# Altium PCB WATSH2.PcbDoc
Units mm, origin at the board's own origin, x right, y up, seen from the top; angles counter-clockwise.
Board outline 152.4 x 101.6 mm, 2 copper layers (Top Layer, Bottom Layer); 50 components, 41 nets, 187 pads, 104 vias.
Unrouted connection lines stored in the file: 14.
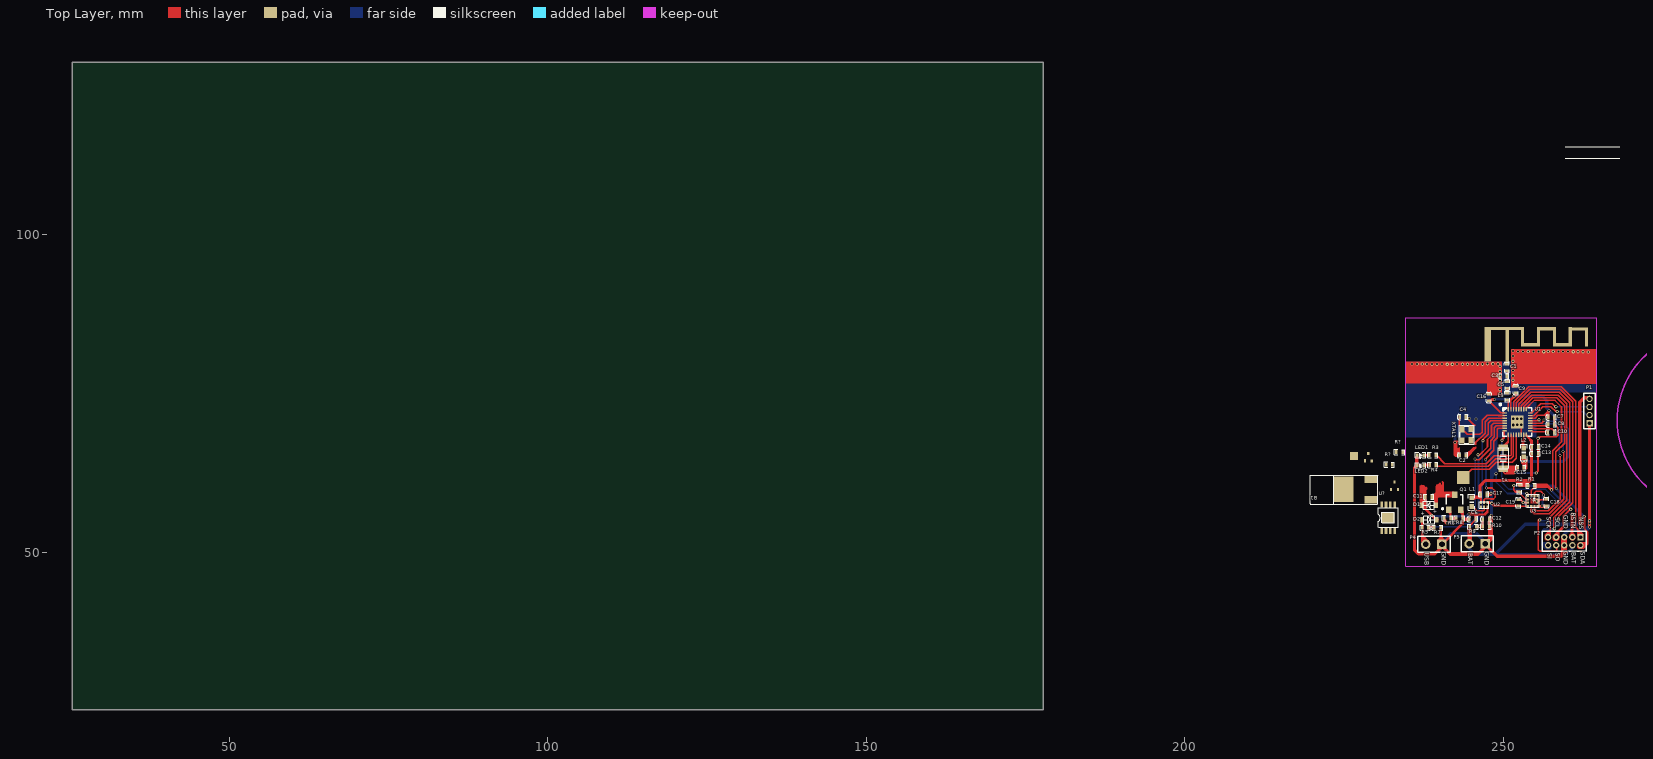
[diagram p0: Top Layer view]
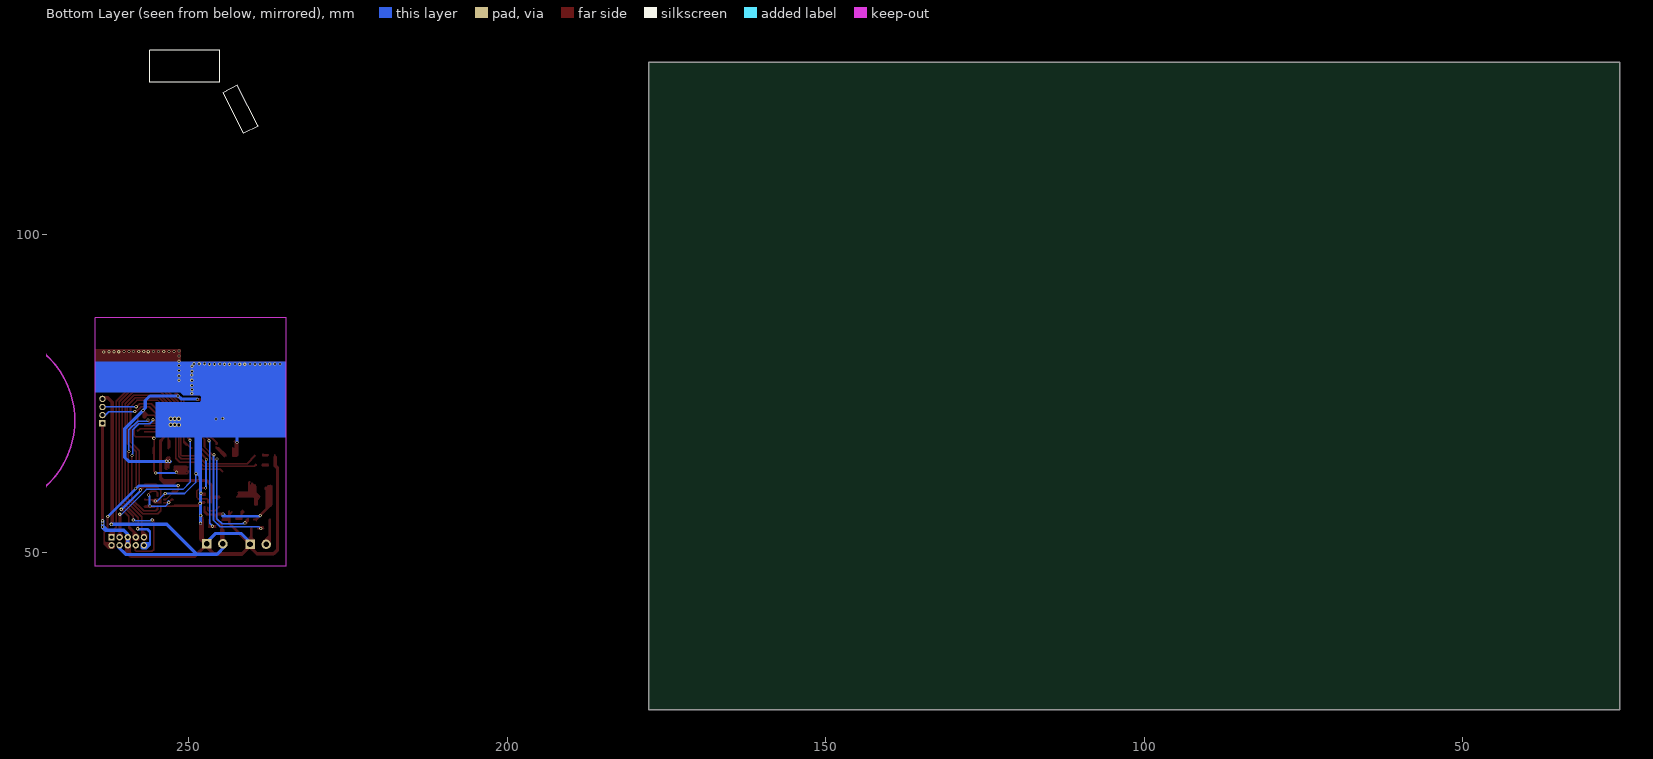
[diagram p1: Bottom Layer view, seen from below]

## Layer stack, top to bottom
Top Layer: signal copper 0.0356
Dielectric: dielectric 0.32, FR-4, Dk 4.8
Bottom Layer: signal copper 0.0356

## Board outline
25.4,25.4 177.8,25.4 177.8,127 25.4,127

## Design rules (kind name [scope] priority, off if disabled: settings)
Clearance [All] p1: gap=0.15
PolygonConnect [All] p1: connectstyle=Relief reliefconductorwidth=0.254 reliefentries=4 polygonreliefangle="90 Angle"
RoomDefinition WATSH2 [InComponentClass('WATSH2')] p1: confinementstyle=ConfineIn formatcopy=TRUE lockcomponents=FALSE outline 0,0 50.8,0 50.8,25.4 0,25.4
RoutingVias [All] p1: holewidth=0.3 width=0.5 viastyle="Through Hole" minholewidth=0.3 minwidth=0.5 maxholewidth=0.3 maxwidth=0.5
SilkscreenOverComponentPads [IsPad] p1: minsilkscreentomaskgap=0.254
SolderMaskExpansion [All] p1: expansion=0.102
Width [All] p1: maxlimit=1 minlimit=0.1 preferedwidth=0.254
27 further rules are at their usual default settings.

## Components (designator, comment, footprint, x,y, rotation, side; value= is the part's Value field where it differs from the comment)
B1 "Motor" MODER 224.914,59.904 r180 top
C1 "2.2PF" 0402_C 250.538,79.12 r90 top
C2 "15PF" 0402_C 243.594,65.308 r180 top
C3 "1PF" 0402_C 250.052,77.757 r0 top
C4 "15PF" 0402_C 243.608,71.32 r180 top
C5 "2.2PF" 0402_C 250.56,76.379 r90 top
C6 "2.2uF" 0402_C 245.175,55.286 r0 top
C7 "104" 0402_C 257.49,71.238 r180 top
C8 "104" 0402_C 257.485,70.141 r180 top
C9 "104" 0402_C 251.964,75.608 r270 top
C10 "104" 0402_C 257.505,68.912 r0 top
C11 "104" 0402_C 238.238,58.763 r180 top
C12 "104" 0402_C 247.237,55.241 r180 top
C13 "106" 0402_C 254.929,65.575 r180 top
C14 "105" 0402_C 254.944,66.608 r180 top
C15 "104" 0402_C 252.741,63.353 r0 top
C16 "104" 0402_C 247.715,74.374 r270 top
C17 "2.2uF" 0402_C 246.892,59.174 r180 top
C18 "104" 0402_C 256.752,57.921 r90 top
C19 "104" 0402_C 252.344,57.85 r270 top
D1 "1N5819" SOD-323 238.199,55.228 r0 top
D2 "1N5819" SOD-323 238.461,57.428 r180 top
L1 "2.2uH" 0603p 245.021,57.956 r270 top
L2 "2.2uH" 0603p 253.195,65.76 r90 top
L3 "0R" 0402_R 250.597,74.596 r90 top
LED1 "LED" 0402_LED 236.984,65.337 r180 top
LED2 "LED" 0402_LED 236.984,63.748 r180 top
P1 "UART" MHDR1X4 263.522,70.355 r90 top
P2 "FLASH_LOAD" MHDR2X5 262.091,52.458 r180 top
P4 "BAT" HDR1X2 240.355,51.342 r180 top
P5 "BAT" HDR1X2 247.162,51.423 r180 top
Q1 "SI2300" SOT-23 242.352,57.944 r0 top
R1 "4.7K" 0402_R 254.293,60.56 r180 top
R2 "4.7K" 0402_R 252.517,60.148 r90 top
R3 "1K" 0402_R 238.951,65.33 r0 top
R4 "1K" 0402_R 238.964,63.772 r0 top
R5 "1M" 0402_R 237.678,53.938 r180 top
R6 "1K" 0402_R 241.276,55.441 r0 top
R7 "470K" 0402_R 239.595,53.934 r180 top
R8 "10K" 0402_R 243.061,55.451 r180 top
R9 "1M" 0402_R 245.15,54.129 r180 top
R10 "470K" 0402_R 247.213,54.146 r180 top
R? "100R" 0402_R 232.142,63.844 r0 top
R? "0.4R" 0402_R 233.739,65.81 r0 top
U1 "BK3431Q" QFN32 252.226,70.53 r270 top
U2 "TPS62730" R-PUSON-N6 246.969,57.527 r0 top
U3 "SC7A21" LGA-12-2*2*1 254.625,58.192 r0 top
U? "TP4056" EMSOP8 231.927,55.564 r0 top
XTAL1 "16MHz_10PPM_12p" 晶振2*2.6 244.341,68.568 r270 top
Y1 "32.768K" 晶振1.5*3.2 249.942,64.858 r270 top

## Footprints (in the part's own frame and the unit in brackets; to place one, negate y for a bottom-side part, rotate by r counter-clockwise, add the part's x,y. Pads: shape width x height; smd on the part's side, far side on the other; paste and mask are expansions set on the pad)
0402_C [mm]
  rect 0.4x0.6 smd: 1(-0.518,-0.008) 2(0.485,-0.01)
  silkscreen extent -0.84,-0.41 0.8,0.39
0402_LED [mm]
  rect 0.4x0.6 smd: 1(-0.506,0.012) 2(0.497,0.012)
  silkscreen extent -0.82,-0.42 0.83,0.51
0402_R [mm]
  rect 0.4x0.6 smd: 1(-0.558,0.013) 2(0.435,0.013)
  silkscreen extent -0.86,-0.4 0.75,0.42
0603p [mil]
  rect 30x30 smd: 1(-27,0) 2(27.5,-0.06)
  silkscreen extent -50,-20 50,20
EMSOP8 [mm]
  rect 1.9x1.65 smd: 0(-0.006,-0.023)
  rect 0.4x1 smd: 1(-1.033,-2.114) 2(-0.356,-2.12) 3(0.33,-2.112) 4(1.026,-2.094) 5(1.033,2.013) 6(0.337,1.995) 7(-0.356,2.016) 8(-1.033,2.022)
  silkscreen extent -1.55,-1.6 1.53,1.5
HDR1X2 [mm] "Connector; Header; 2 Position"
  rect 1.5x1.5 hole 0.9: 1(0,0)
  round 1.5 hole 0.9: 2(2.54,0)
  silkscreen extent -1.27,-1.27 3.81,1.27
LGA-12-2*2*1 [mm]
  rect 0.32x0.32 smd: 1(-0.757,0.702) 2(-0.76,0.19) 3(-0.758,-0.308) 4(-0.751,-0.826) 5(-0.253,-0.826) 6(0.25,-0.82) 7(0.748,-0.826) 8(0.751,-0.314) 9(0.748,0.19) 10(0.748,0.699) 11(0.25,0.696) 12(-0.251,0.699)
  silkscreen extent -1.04,-1.07 1.04,0.97
MHDR1X4 [mm] "Connector; Header; 4 Position"
  rect 1x1 hole 0.6: 1(0,0)
  round 1 hole 0.6: 2(1.27,0) 3(2.54,0) 4(3.81,0)
  silkscreen extent -0.9,-0.9 4.71,0.9
MHDR2X5 [mm] "Connector; Header; 5x2 Position"
  rect 1x1 hole 0.6: 1(0,0)
  round 1 hole 0.6: 2(0,1.27) 3(1.27,0) 4(1.27,1.27) 5(2.54,0) 6(2.54,1.27) 7(3.81,0) 8(3.81,1.27) 9(5.08,0) 10(5.08,1.27)
  silkscreen extent -0.9,-0.9 5.98,2.17
MODER [mm]
  rect 3x4 smd: 0(-0.027,-0.043)
  rect 2x1.2 smd: 1(-4.31,-1.69) 2(-4.279,1.589)
  silkscreen extent -5.35,-2.26 5.24,2.24
QFN32 [mm]
  oct 0.22x0.7 smd: 1(-1.423,-2.039) 8(1.377,-2.039) 17(1.377,1.961) 24(-1.423,1.961)
  rect 0.22x0.7 smd: 2(-1.023,-2.039) 3(-0.623,-2.039) 4(-0.223,-2.039) 5(0.177,-2.039) 6(0.577,-2.039) 7(0.977,-2.039) 18(0.977,1.961) 19(0.577,1.961) 20(0.177,1.961) 21(-0.223,1.961) 22(-0.623,1.961) 23(-1.023,1.961)
  oct 0.7x0.22 smd: 9(1.977,-1.439) 16(1.977,1.361) 25(-2.023,1.361) 32(-2.023,-1.439)
  rect 0.7x0.22 smd: 10(1.977,-1.039) 11(1.977,-0.639) 12(1.977,-0.239) 13(1.977,0.161) 14(1.977,0.561) 15(1.977,0.961) 26(-2.023,0.961) 27(-2.023,0.561) 28(-2.023,0.161) 29(-2.023,-0.239) 30(-2.023,-0.639) 31(-2.023,-1.039)
  rect 2x2 smd: 33(-0.023,-0.039)
  silkscreen extent -2.91,-2.86 2.26,2.23
R-PUSON-N6 [mm]
  rect 0.3x0.49 smd: 1(-0.49,-0.365) 2(0.003,-0.368) 3(0.508,-0.377) 4(0.508,0.365) 5(0,0.368) 6(-0.487,0.368)
  silkscreen extent -0.74,-0.53 0.76,0.53
SOD-323 [mm]
  rect 0.63x0.83 smd: 1(-0.965,-0.025) 2(1.321,-0.025)
  silkscreen extent -0.69,-0.66 1.02,0.61
SOT-23 [mm]
  rect 0.9x0.95 smd: 1(-0.95,-1.175) 2(0.95,-1.175) 3(0,1.175)
  silkscreen extent -2.03,-1.14 1.3,1.18
晶振1.5*3.2 [mm]
  rect 1x1.5 smd: 1(-1.643,0.01) 2(1.656,0.016)
  silkscreen extent -1.64,-0.76 1.64,0.8
晶振2*2.6 [mm]
  rect 1x0.8 smd: 1(-0.846,-0.852) 2(0.938,-0.828) 3(0.92,0.6) 4(-0.864,0.612)
  silkscreen extent -1.43,-1.31 1.5,1.05

## Part data
B1: "Motor, General"
C1 C3 C5: library part CAP, "Capac"
C2 C4: library part CAP, "C"
C6 C7 C8 C9 C10 C11 C12 C13 C14 C15 C16 C17 C18 C19: library part Cap, "Capac"
D1 D2: library part "Diode 1N4001", "1 Amp General Purpose Recti"
L1 L2: library part INDUCTOR
L3: library part INDU
P1: library part MHDR1X4, "Header, 4-Pin"
P2: library part MHDR2X5, "Header, 5-Pin, Dual row"
P4 P5: library part "Header 2", "Header, 2-Pin"
Q1: library part MOSFET-N, "N-Channel MOSFET"
U2: library part TPS627
Y1: library part XTAL_1, "Crys"

## Free pads (board coordinates)
  rect 1.25x1.25 smd: 4(226.573,65.183)
  rect 0.35x0.5 smd: 4(228.263,64.444) 4(228.798,65.614) 4(229.347,64.428) 4(232.357,59.941) 4(232.891,61.111) 4(233.44,59.925)
  rect 1x5 smd: 7(247.526,82.509)
  rect 3.8x0.5 smd: 7(248.914,85.203)
  rect 0.5x6 smd: 7(250.588,82.451)
  rect 2.9x0.5 smd: 7(251.782,85.211)
  rect 0.5x3 smd: 7(252.982,83.922) 7(255.489,83.919) 7(258.003,83.9) 7(260.503,83.916) 7(263.029,83.906)
  rect 3x0.5 smd: 7(254.238,82.659) 7(256.76,85.165) 7(259.258,82.652) 7(261.784,85.153)
  rect 2x2 smd: 8(243.714,61.837)

## Via types
v1: diameter 0.5, hole 0.3, Top Layer to Bottom Layer, 98 vias
v2: diameter 0.7, hole 0.4, Top Layer to Bottom Layer, 6 vias

## Nets (pads, with @x,y where several pads share a name; then routed paths per layer and width w, separated by ;. In a path a pad name is that pad's centre, name@x,y a point inside that pad or via, vN(x,y) a via of type N, cw(c..) or ccw(c..) an arc to the next point about the centre after c; other vN are vias at no path point)
ANT: L3.1 U1.32 | length 1.4
  Top Layer w0.254: L3.1@250.772,73.947 250.784,73.935 U1.32@250.784,72.577
BAT: B1.1 C6.2 C11.2 D1.2 D2.2 P1.1 P2.4 P5.2 R9.2 U2.3 U?.5 | length 115.4
  Top Layer w0.254: 236.955,60.507 236.966,60.497 236.966,57.608 237.26,57.314 D2.2@237.26,57.324 ; D2.2@237.112,57.424 237.19,57.502 237.19,60.632 ; D2.2@237.184,57.518 237.184,57.364 239.397,55.151 D1.2@239.397,55.046 ; 237.229,58.846 237.249,58.866 C11.2@237.691,58.866 ; D2.2@237.273,57.689 237.273,57.486 239.502,55.257 D1.2@239.543,55.257 ; 237.386,60.234 237.386,60.423 ; 237.457,60.242 237.813,59.887 237.813,56.872 237.876,56.809 ; 237.56,60.44 237.568,60.432 237.568,57.172 ; D1.2@239.636,55.234 D1.2@239.642,55.227 ; D1.2@239.706,55.274 D1.2@239.743,55.237 ; P5.2@244.426,51.327 244.702,51.603 R9.2@244.702,54.037 ; P5.2@244.519,51.984 244.519,53.642 244.711,53.834 R9.2@244.711,53.989 ; v1@244.587,56.208 245.363,56.208 245.724,55.846 ; v1(244.6,56.093) 245.379,56.093 245.672,55.801 245.733,55.801 ; v1@244.63,56.013 244.635,56.018 245.308,56.018 245.605,55.72 ; P5.2@244.646,51.152 P5.2@244.691,51.107 ; R9.2@244.659,54.055 244.777,53.937 244.777,53.841 244.976,53.642 P5.2@244.976,51.903 ; R9.2@244.71,54.178 244.71,54.261 C6.2@245.629,55.18 ; R9.2@244.733,53.856 244.851,53.738 P5.2@244.851,52.021 ; P5.2@244.759,51.717 P5.2@244.792,51.684 ; C6.2@245.602,55.39 245.602,55.772 245.867,56.038 247.108,56.038 247.202,56.132 ; C6.2@245.662,55.235 245.662,55.551 246.083,55.972 247.18,55.972 ; 246.973,56.05 247.381,56.458 ; 247.058,55.985 247.456,56.382 U2.3@247.456,57.137 ; 247.119,55.96 247.496,56.337 247.496,57.198 U2.3@247.491,57.203
  Top Layer w0.5: D2.2@237.145,57.409 237.243,57.507 237.243,59.534 237.858,60.15 ; 237.407,59.835 237.407,60.371 237.417,60.381 ; v1(262.129,54.477) 261.975,54.631 261.975,73.644 262.675,74.345 263.53,74.345
  Bottom Layer w0.254: v1(238.758,55.885) 238.803,55.841 244.794,55.841 ; v1@238.774,55.694 244.682,55.694 244.755,55.767 ; 243.702,55.827 244.131,55.827 v1@244.479,56.176
  Bottom Layer w0.5: P5.2@244.378,50.921 245.525,49.774 248.717,49.774 253.42,54.477 v1(262.129,54.477) ; 246.75,49.761 259.877,49.761 260.919,50.803 P2.4@260.919,51.198
BAT_TEXT: C12.2 R9.1 R10.2 U1.4 | length 24.5
  Top Layer w0.2: v1@246.676,67.711 246.688,67.711 247.601,68.624 247.601,70.324 248.046,70.768 U1.4@249.988,70.768 ; 249.722,70.757 U1.4@250.227,70.757
  Top Layer w0.254: R9.1@245.709,54.226 245.762,54.278 246.386,54.278 246.715,54.608 ; R9.1@245.734,54.028 246.759,54.028 R10.2@246.813,54.082 ; v1@246.42,54.123 246.507,54.123 R10.2@246.624,54.241 ; C12.2@246.655,55.167 246.711,55.111 246.711,54.048 R10.2@246.727,54.033 ; R10.2@246.705,54.035 246.759,54.089 C12.2@246.759,55.295
  Bottom Layer w0.2: v1@246.336,54.307 246.648,54.619 v1@246.648,67.612
  other v1: 246.265,54.183 246.817,67.594
GND: C2.2 C3.1 C4.1 C6.1 C7.1 C8.1 C9.1 C12.1 C13.1 C14.1 C15.1 C16.1 C17.1 C18.2 C19.2 LED1.2 LED2.2 P1.4 P2.5 P2.6 P4.1 P5.1 Q1.2 R7.1 R8.1 R10.1 U1.14 U1.33 U2.4 U3.1 U3.4 U3.8 U3.9 U?.1 U?.3 XTAL1.2 XTAL1.4 Y1.2 | length 326.9
  Top Layer w0.254: LED2.2@236.425,63.761 236.455,63.79 LED1.2@236.455,65.37 ; LED2.2@236.437,63.651 236.437,63.497 236.093,63.153 236.093,50.581 236.682,49.992 239.276,49.992 P4.1@240.058,50.774 ; P4.1@239.722,52.034 240.093,52.405 240.093,53.842 R7.1@240.18,53.928 ; P4.1@239.777,51.955 239.849,51.955 240.062,52.168 ; P4.1@240.001,51.446 240.161,51.606 R7.1@240.161,53.943 ; R7.1@240.172,53.881 240.227,53.826 240.227,52.524 P4.1@240.796,51.955 ; P4.1@240.217,51.675 240.599,51.675 243.552,54.627 243.552,56.079 Q1.2@243.218,56.412 ; 240.219,52.271 240.598,51.892 P4.1@240.598,51.861 ; P4.1@240.644,50.909 241.851,49.703 245.714,49.703 247.164,51.153 P5.1@247.164,51.412 ; P4.1@240.942,51.802 243.665,54.525 243.665,55.468 R8.1@243.629,55.505 ; v1@242.478,67.371 242.478,65.472 242.608,65.343 ; 242.629,65.3 242.629,67.404 242.683,67.458 ; 242.78,65.278 242.78,66.411 ; 242.845,67.533 242.338,67.533 242.327,67.544 242.327,65.3 242.435,65.192 243.082,65.192 C2.2@243.093,65.181 ; C2.2@243.035,65.268 243.035,66.411 243.083,66.46 ; Q1.2@243.593,56.6 243.652,56.541 R8.1@243.652,55.399 ; R8.1@243.65,55.227 243.724,55.153 C6.1@244.682,55.153 ; R8.1@243.657,55.419 243.672,55.433 244.571,55.433 C6.1@244.593,55.411 ; R8.1@243.73,55.722 244.134,55.318 244.215,55.318 ; R8.1@243.753,55.271 243.768,55.286 C6.1@244.512,55.286 ; C4.1@244.161,71.298 245.431,70.028 245.538,70.028 ; C17.1@247.369,59.277 247.447,59.356 v1(248.046,59.356) ; C17.1@247.382,59.135 247.382,59.141 247.473,59.05 247.997,59.05 248.149,59.202 v1@248.149,59.348 ; P5.1@247.402,51.904 247.69,52.193 247.69,55.194 247.798,55.301 C12.1@247.798,55.295 ; 247.403,76.874 247.54,76.736 247.54,75.05 247.703,74.888 C16.1@247.711,74.888 ; P5.1@247.449,51.73 247.838,52.119 C12.1@247.838,55.295 ; U2.4@247.489,57.865 248.037,57.865 v1@248.109,57.793 ; U2.4@247.489,57.943 247.556,58.009 247.816,58.009 v1@248.037,57.788 ; U2.4@247.589,57.776 248.131,57.776 v1@248.17,57.738 ; 247.62,59.239 247.626,59.245 v1@248.003,59.245 ; C16.1@247.717,74.861 247.717,77.211 247.913,77.407 ; C16.1@247.792,74.872 247.792,74.888 247.865,74.961 247.865,77.028 247.873,77.036 ; C12.1@247.82,55.187 247.82,55.579 v1(248.105,55.864) ; v1@248.156,57.669 248.485,57.341 C19.2@252.632,57.341 ; v1@248.264,57.837 248.652,57.448 252.223,57.448 252.263,57.408 C19.2@252.323,57.408 ; Y1.2@249.947,62.845 249.996,62.796 v1@252.016,62.796 ; 250.074,62.629 250.31,62.393 251.604,62.393 C15.1@252.281,63.07 ; Y1.2@250.153,63.467 250.183,63.437 C15.1@252.224,63.437 ; Y1.2@250.22,63.209 250.242,63.187 252.21,63.187 C15.1@252.224,63.172 ; Y1.2@250.28,62.962 250.319,63.002 252.212,63.002 ; Y1.2@250.375,63.526 250.367,63.526 250.448,63.607 C15.1@252.269,63.607 ; 250.467,62.688 250.555,62.599 v1@251.781,62.599 ; C19.2@252.54,57.357 252.558,57.339 U3.4@253.879,57.339 ; U1.33@252.739,70.168 252.788,70.12 U1.14 ; U3.1@253.81,58.895 v1@253.81,59.309 ; v1(255.149,62.527) 255.421,62.8 255.421,65.571 255.407,65.586 C13.1@255.536,65.586 ; U3.9@255.36,58.357 256.855,58.357 C18.2@256.885,58.387 ; U3.9@255.365,58.327 255.38,58.312 U3.8@255.38,57.844 ; C14.1@255.383,66.675 255.383,67.807 255.793,68.217 258.344,68.217 258.576,68.45 258.576,69.666 C8.1@258.044,70.198 ; C13.1@255.407,65.627 255.407,66.602 C14.1@255.462,66.657 ; U3.8@255.467,58.026 255.772,58.331 256.672,58.331 C18.2@256.719,58.378 ; C13.1@255.493,65.603 255.523,65.633 C14.1@255.523,66.492 ; C8.1@257.994,70.067 257.994,71.181 C7.1@258.049,71.236
  Top Layer w0.5: LED1.2@236.395,65.033 236.395,63.645 236.023,63.273 236.023,50.489 236.651,49.861 239.262,49.861 240.545,51.143 P4.1@240.545,51.166 ; P4.1@240.485,50.937 241.651,49.771 245.989,49.771 247.239,51.021 P5.1@247.239,51.253 ; P4.1@240.569,50.885 241.577,49.876 246.052,49.876 246.966,50.79 P5.1@246.966,51.274 ; P5.1@247.346,51.134 249.027,49.453 259.058,49.453 259.709,50.104 259.709,52.249 P2.5@259.562,52.396 ; P5.1@247.437,51.369 247.437,51.523 248.15,52.236 v1@248.15,55.788 ; 258.505,49.421 258.741,49.421 259.315,49.995 P2.5@259.315,52.391 ; v1@263.501,54.094 263.501,70.335 263.52,70.355 263.522,70.355
  Bottom Layer w0.254: P4.1@240.236,51.459 240.275,51.459 241.747,52.93 245.749,52.93 P5.1@247.093,51.586 ; P4.1@240.442,51.881 241.727,53.166 245.837,53.166 247.358,51.645 P5.1@247.358,51.596 ; 242.163,68.502 242.261,68.403 v1@242.261,67.316 ; 242.341,68.644 242.395,68.591 v1@242.395,67.333 ; v1@242.502,67.289 242.502,68.43 242.636,68.564 ; v1@247.955,55.815 248.2,55.57 248.2,54.576 248.223,54.599 v1@248.239,54.599 ; v1@247.956,59.304 248.008,59.252 248.008,55.007 248.121,54.894 v1@248.121,54.877 ; 247.962,69.94 248.025,69.877 248.025,61.116 248.12,61.022 248.162,61.022 ; v1@248.01,55.823 248.01,54.576 v1@248.026,54.56 ; 248.025,61.221 248.046,61.221 248.288,61.463 248.288,68.837 248.498,69.047 ; v1(248.046,59.356) 248.105,59.297 v1(248.105,55.864) ; 248.097,58.603 248.014,58.686 248.014,61.823 v1@248.731,62.54 ; v1@248.121,59.35 248.121,61.793 248.221,61.894 ; 248.151,61.946 248.151,68.732 248.246,68.826 ; v1@248.277,54.627 248.277,61.899 v1@248.816,62.439 ; 248.403,68.932 248.466,68.868 248.466,62.366 ; 248.571,68.742 248.635,68.679 v1@248.635,62.503 ; 248.666,69.037 248.845,68.858 v1@248.845,62.492 ; v1@248.824,62.387 248.971,62.534 248.971,68.606 248.855,68.721 ; v1@248.902,62.473 248.902,61.05 250.643,59.308 v1@253.668,59.308 ; v1(251.889,62.642) 252.004,62.527 v1(255.149,62.527) ; v1@253.576,59.277 v1@253.63,59.277 ; v1@253.757,59.331 255.017,58.071 v1@255.251,58.071
  Bottom Layer w0.5: 246.527,73.661 246.916,73.661 248.209,74.953 250.771,74.953 251.252,75.434 ; 247.511,74.004 249.272,72.242 249.959,72.242 ; P2.6@259.537,51.26 259.537,52.898 260.175,53.536 262.735,53.536 v1@263.392,54.193 ; P2.6@259.593,51.088 259.593,52.509 P2.5@259.64,52.557 ; 262.484,53.504 263.057,53.504 263.477,53.924 v1@263.477,55.045
  other v1: 263.488,54.065 263.506,54.591 248.133,54.633 263.497,55.045 248.181,57.776 255.231,58.118 253.664,59.297 248.83,62.426 242.413,67.328 255.454,67.977 245.704,70.986 244.647,71.111 249.502,75.002 249.447,75.612 249.489,76.289 249.489,77.079 251.497,77.089 251.504,77.786 249.51,77.911 249.478,78.496 251.525,78.618 249.478,79.287 251.525,79.408 241.188,79.605 241.978,79.605 243.566,79.605 244.357,79.605 236.469,79.63 237.259,79.63 237.978,79.638 238.81,79.617 239.6,79.617 240.356,79.626 242.734,79.626 245.1,79.638 245.932,79.617 246.722,79.617 235.637,79.651 247.504,79.689 248.336,79.668 249.126,79.668 251.504,80.076 251.525,80.908 260.957,81.56 261.688,81.568 262.478,81.568 263.31,81.547 253.897,81.585 254.704,81.593 255.494,81.593 256.326,81.573 258.654,81.585 259.334,81.581 260.125,81.581 252.275,81.606 253.065,81.606 257.032,81.606 257.822,81.606 251.525,81.699
  other v2: 251.536,70.071 252.186,70.091 252.829,70.084 251.556,71.022 252.179,71.029 252.829,71.022
INT1: U1.20 U3.5 | length 23.7
  Top Layer w0.2: U1.20@254.205,70.353 256.003,70.353 v1@256.356,70.705 ; U3.5 254.371,56.622 254.878,56.115 257.188,56.115 259.496,58.423 v1@259.496,65.948
  Bottom Layer w0.2: v1@256.356,70.693 257.954,70.693 259.356,69.291 v1@259.356,65.98
  other v1: 259.348,65.93 256.356,70.84
INT2: U1.21 U3.6 | length 22.4
  Top Layer w0.2: U1.21@254.193,70.767 255.417,70.767 v1@255.564,70.913 ; U3.6@254.867,57.361 254.867,56.874 255.153,56.588 ; U3.6@254.917,57.263 254.917,56.833 255.166,56.584 257.059,56.584 258.928,58.452 258.928,65.308 258.903,65.333 v1@258.903,65.365
  Bottom Layer w0.2: v1@255.612,70.835 255.612,70.728 256.1,70.239 257.815,70.239 258.73,69.325 258.73,65.538 v1@258.903,65.365
  other v1: 258.901,65.281 255.606,70.889
LED1: R3.2 U1.10 | length 16.1
  Top Layer w0.2: R3.2@239.508,65.293 240.815,63.986 247.304,63.986 248.564,65.247 251.105,65.247 251.191,65.333 U1.10@251.191,68.605
LED2: R4.2 U1.11 | length 16.4
  Top Layer w0.2: R4.2@239.368,63.697 239.368,63.874 239.659,63.583 247.604,63.583 248.79,64.768 251.162,64.768 251.58,65.186 U1.11@251.58,68.394
MOTOR: R6.1 U1.6 | length 28
  Top Layer w0.2: R6.1@240.687,55.444 240.602,55.359 240.602,55.011 v1@241.046,54.567 ; 240.706,55.059 241.035,54.729 v1@241.053,54.729 ; R6.1@240.711,55.413 240.711,55.207 v1@241.235,54.684 ; R6.1@240.742,55.407 240.742,55.316 v1@241.217,54.841 ; v1@245.604,64.634 246.237,64.634 247.985,66.382 247.985,67.63 248.553,68.198 248.553,69.661 248.841,69.95 U1.6@250.223,69.95
  Bottom Layer w0.2: v1@241.161,54.735 241.313,54.584 244.748,54.584 245.55,55.386 v1@245.55,64.785 ; v1@241.223,54.829 241.479,54.573 243.251,54.573
  other v1: 241.132,54.713 245.517,64.728
NetANT1_1: C1.2 pad.7
NetB1_2: B1.2 C11.1 D2.1 Q1.3 | length 24.9
  Top Layer w0.254: C11.1@238.819,58.787 239.329,58.787 239.338,58.797 ; C11.1@238.886,58.695 239.225,58.356 239.225,57.583 239.273,57.535 D2.1@239.265,57.535 ; 238.957,58.956 240.038,60.037 240.038,60.89 ; 239.249,58.388 239.249,59.13 239.312,59.193 ; 239.367,59.24 Q1.3@242.145,59.24 ; D2.1@239.456,57.453 239.456,60.426 239.77,60.74 ; 239.478,58.791 242.437,58.791 Q1.3@242.453,58.807 ; 239.494,59.018 239.535,59.059 Q1.3@242.307,59.059 ; 239.527,58.913 Q1.3@242.048,58.913 ; D2.1@239.596,57.583 239.596,58.609 240.133,59.145 240.133,59.335 ; 240.378,61.158 240.378,61.174 240.512,61.039 240.512,59.595 240.63,59.477 Q1.3@242.177,59.477
NetC1_1: C1.1 C3.2 C5.2 | length 1.6
  Top Layer w0.254: C5.2@250.699,76.944 250.699,78.503 C1.1@250.735,78.539
NetC2_1: C2.1 U1.3 XTAL1.3 | length 15.7
  Top Layer w0.2: C2.1@244.138,65.292 244.399,65.292 245.372,66.266 ; C2.1@244.197,65.383 245.339,66.525 245.553,66.525 ; C2.1@244.205,65.198 244.205,65.257 245.222,66.274 ; C2.1@244.3,65.103 245.686,66.488 245.686,66.65 ; 245.54,67.07 245.54,67.209 247.124,68.792 247.124,70.581 247.694,71.151 U1.3@250.226,71.151 ; 245.644,66.938 245.644,67.293 ; 249.515,71.165 U1.3@250.264,71.165
NetC4_2: C4.2 U1.2 XTAL1.1 | length 12.1
  Top Layer w0.2: C4.2@243.105,71.346 243.105,69.957 243.129,69.933 ; XTAL1.1@243.417,69.459 244.29,68.586 246.232,68.586 ; 245.959,68.591 246.289,68.591 246.659,68.961 246.659,70.789 247.443,71.572 U1.2@250.062,71.572 ; 249.19,71.545 U1.2@250.243,71.545
NetC5_1: C5.1 L3.2 | length 1.4
  Top Layer w0.254: L3.2@250.632,75.019 250.632,75.738 C5.1@250.662,75.768 ; L3.2@250.76,75.123 C5.1@250.76,75.786
NetC8_2: C8.2 U1.19 | length 2.8
  Top Layer w0.2: U1.19@254.157,69.954 256.906,69.954 C8.2@256.926,69.974
NetC10_1: C10.1 U1.17 | length 2.8
  Top Layer w0.2: U1.17@254.152,69.133 254.469,69.133 254.58,69.022 C10.1@256.956,69.022
NetC10_2: C10.2 U1.18 | length 4.1
  Top Layer w0.2: U1.18@254.122,69.556 254.792,69.556 254.832,69.516 257.611,69.516 C10.2@258.033,69.093
NetL1_2: L1.2 U2.2 | length 2.5
  Top Layer w0.254: L1.2@245.228,57.243 245.89,56.582 246.817,56.582 246.968,56.733 U2.2@246.968,57.183
NetL2_2: L2.2 U1.15 | length 4.5
  Top Layer w0.2: L2.2@253.079,66.805 253.079,67.515 253.1,67.537 ; L2.2@253.115,66.497 252.921,66.69 252.921,67.53 253.172,67.781 ; L2.2@253.152,66.335 253.2,66.384 U1.15@253.2,68.619
NetLED1_1: LED1.1 R3.1 | length 1.7
  Top Layer w0.254: LED1.1@237.523,65.426 238.317,65.426 R3.1@238.35,65.458 ; LED1.1@237.539,65.313 237.58,65.272 R3.1@238.342,65.272
NetLED2_1: LED2.1 R4.1 | length 1.7
  Top Layer w0.254: LED2.1@237.515,63.926 R4.1@238.39,63.926 ; LED2.1@237.539,63.716 237.547,63.708 R4.1@238.399,63.708
NetQ1_G: Q1.1 R6.2 R8.2 | length 5.3
  Top Layer w0.254: Q1.1@241.336,56.434 241.644,56.127 241.644,55.518 R6.2@241.671,55.491 ; Q1.1@241.471,56.703 241.743,56.43 241.743,55.428 241.773,55.458 R8.2@242.605,55.458 ; R6.2@241.665,55.361 241.735,55.291 242.533,55.291 R8.2@242.544,55.302 ; 241.751,55.922 241.751,55.728 241.886,55.593 R8.2@242.501,55.593
NetR?_2: U?.2
NetU1_9: U1.9 Y1.1 | length 4.3
  Top Layer w0.2: Y1.1@250.308,66.871 250.793,67.356 U1.9@250.793,68.577
  Top Layer w0.254: Y1.1@249.552,66.466 249.666,66.466 250.735,67.535 U1.9@250.735,68.278
P00/UART1_TX: P1.2 U1.23 | length 10.4
  Top Layer w0.2: U1.23@254.125,71.535 254.742,71.535 256.143,72.937 257.435,72.937 v1@258.26,72.112
  Bottom Layer w0.2: v1@258.394,72.174 262.507,72.174 P1.2@263.359,71.321
  other v1: 258.45,72.19
P01/UART1_RX: P1.3 U1.24 | length 10
  Top Layer w0.2: U1.24@254.178,71.971 254.472,71.971 255.892,73.391 257.666,73.391 v1@258.063,72.994
  Bottom Layer w0.2: v1@258.148,72.896 263.284,72.896 P1.3@263.424,72.756
  other v1: 258.223,72.94
P02/I2C_SCL: P2.7 R1.1 U1.25 U3.12 | length 51.3
  Top Layer w0.2: v1(257.537,59.892) v1@257.567,59.863 ; P2.7@258.283,52.483 258.283,52.887 259.374,53.978 259.374,55.743 260.459,56.828 v1@260.635,56.828 ; 258.476,53.094 258.591,52.98 P2.7@258.591,52.7 ; 258.828,53.546 258.691,53.41 258.691,52.19 258.483,51.982 257.974,51.982 257.816,52.14 257.816,52.599 259.373,54.156 259.373,54.931
  Top Layer w0.254: U1.25@253.601,72.636 253.601,72.709 254.817,73.925 258.092,73.925 259.111,72.906 259.111,67.428 257.728,66.046 v1@257.728,59.869 ; U3.12 254.374,59.797 R1.1@254.947,60.371 ; R1.1 254.851,60.555 R1.1@254.911,60.614 ; R1.1@254.879,60.441 254.976,60.344 256.955,60.344 v1@257.467,59.832 ; R1.1@254.897,60.571 255.049,60.723 256.882,60.723 v1@257.602,60.002 ; R1.1@254.959,60.532 257.071,60.532 v1@257.594,60.009
  Bottom Layer w0.2: v1@257.518,59.902 257.518,59.786 v1@260.685,56.619
  Bottom Layer w0.254: v1@257.622,59.846 257.622,59.803 v1@260.557,56.868
  other v1: 260.574,56.83
P03/I2C_SDA: P2.2 R2.1 U1.26 U3.2 | length 65
  Top Layer w0.2: U1.26@253.2,72.578 253.2,72.941 254.62,74.362 258.336,74.362 259.598,73.1 259.598,67.197 258.244,65.844 v1@258.244,60.06
  Top Layer w0.254: v1@251.601,60.493 251.601,59.895 251.913,59.583 R2.1@252.252,59.583 ; 251.788,59.619 251.848,59.679 252.498,59.679 R2.1@252.571,59.606 ; 251.866,59.546 251.88,59.56 R2.1@252.488,59.56 ; 251.916,59.523 252.525,59.523 R2.1@252.571,59.569 ; R2.1@252.365,59.565 252.365,59.561 253.559,58.367 U3.2@253.892,58.367 ; P2.2@262.355,50.898 263.255,51.799 263.255,53.243 262.729,53.769 v1@262.729,55.686 ; 262.458,50.769 263.17,51.48 ; P2.2@262.512,51.399 262.534,51.378 262.873,51.378 ; 263.256,52.122 263.256,51.405 262.582,50.731 261.811,50.731 261.714,50.828 261.714,51.356 261.93,51.572 263.046,51.572 263.261,51.788 263.261,52.165
  Bottom Layer w0.2: v1@251.721,60.453 257.894,60.453 257.906,60.441 ; 257.802,60.469 v1@262.58,55.691
  Bottom Layer w0.254: v1@251.663,60.56 251.674,60.571 257.893,60.571 262.725,55.738 v1@262.756,55.738
  other v1: 262.686,55.696 258.333,60.117 251.62,60.566
P04/SPI_SCK: P2.9 U1.27 | length 36.1
  Top Layer w0.2: U1.27@252.768,72.582 252.768,73.118 254.412,74.763 258.571,74.763 259.962,73.372 259.962,58.241 257.354,55.633 257.354,52.919 P2.9@256.963,52.528 ; P2.9@256.804,52.721 256.804,52.8 257.228,53.223 ; P2.9@257.192,52.886 257.192,53.001 ; 257.285,53.496 256.546,52.757 256.546,52.219 256.747,52.018 257.098,52.018 257.35,52.269 257.35,53.941
P05/SPI_SI: P2.10 U1.28 | length 44
  Top Layer w0.2: U1.28@252.394,72.504 252.394,73.319 254.288,75.213 258.778,75.213 260.416,73.575 260.416,58.024 257.876,55.484 v1@257.876,53.624
  Bottom Layer w0.3: 256.099,51.659 256.223,51.535 257.234,51.535 257.39,51.379 257.39,50.785 257.266,50.661 256.64,50.661 256.04,51.262 256.04,53.16 256.575,53.694 v1@258.03,53.694 ; P2.10@256.792,50.907 256.043,51.656 256.043,53.422 256.356,53.734 v1@258.05,53.734
  other v1: 257.994,53.778
P06/SPI_SO: P2.8 U1.29 | length 43
  Top Layer w0.2: U1.29 251.988,73.526 254.125,75.663 258.913,75.663 260.875,73.701 260.875,57.893 258.694,55.712 v1@258.694,55.14 ; v1@255.716,55.342 255.494,55.12 255.494,50.498 255.768,50.224 258.236,50.224 258.34,50.329 P2.8@258.34,51.112
  Bottom Layer w0.2: v1@255.716,55.342 256.03,55.027 258.339,55.027 v1@258.666,55.355
  other v1: 258.688,55.14 255.7,55.158
P07/SPI_NSS: P2.1 U1.30 | length 38.9
  Top Layer w0.2: U1.30 251.588,73.234 ; U1.30@251.593,72.571 251.593,73.743 253.948,76.098 259.075,76.098 261.389,73.785 261.389,53.986 P2.1@262.513,52.863 ; 261.445,53.928 261.677,53.696 261.677,52.753 P2.1@262,52.429 ; P2.1@261.757,52.855 261.757,53.405 261.833,53.48 ; 261.795,53.038 261.811,53.022 262.221,53.022 ; 261.865,53.383 261.898,53.383 P2.1@262.42,52.86 ; 261.876,53.119 261.876,53.222 261.908,53.254 ; 261.957,53.06 261.957,53.195 262,53.238
RSTN: P2.3 U1.8 | length 32.5
  Top Layer w0.254: v1@249.686,67.727 249.686,67.749 249.961,68.024 U1.8@249.961,69.086 ; v1(249.765,67.68) 250.097,68.012 U1.8@250.097,69.131 ; P2.3@260.668,52.447 260.668,55.913 v1(260.81,56.055) ; 260.686,53.1 260.449,52.863 260.449,52.287 260.654,52.082 261.049,52.082 261.207,52.24 261.207,52.792 260.844,53.155 v1@260.844,55.973 ; 260.828,53.053 260.844,53.037 P2.3@260.844,52.69
  Bottom Layer w0.254: v1(249.765,67.68) 249.765,61.06 250.868,59.957 256.61,59.957 v1@260.703,55.865
SW: C7.2 C9.2 C15.2 C16.2 L2.1 U1.1 U1.22 U1.31 | length 66.5
  Top Layer w0.2: C16.2@247.736,73.959 247.763,73.986 248.057,73.986 248.253,74.182 v1@248.654,74.182 ; C16.2@247.739,73.819 249.584,71.974 U1.1@250.248,71.974 ; C16.2@247.807,73.914 247.95,73.914 247.986,73.95 v1@248.637,73.95 ; C16.2@247.95,73.834 248.191,74.075 v1(248.583,74.075) ; U1.31@251.172,72.805 251.172,73.918 251.762,74.507 C9.2@251.762,75.038 ; U1.31 251.188,73.586 ; 251.188,73.582 251.188,74.076 251.669,74.556 v1@251.674,74.556 ; v1@251.52,74.475 251.52,74.641 251.911,75.032 C9.2@251.911,75.082 ; v1@251.568,74.68 251.866,74.977 C9.2@251.866,75.037 ; v1@251.645,74.462 251.674,74.491 251.745,74.491 252.132,74.878 C9.2@252.132,75.09 ; v1@251.799,74.753 252.09,75.045 C9.2@252.09,75.074 ; 252.875,64.61 252.875,64.149 253.159,63.864 253.159,63.66 ; 252.908,64.676 253.135,64.449 253.135,63.331 253.168,63.298 C15.2@253.185,63.298 ; 253.028,64.096 252.931,64.194 252.931,64.949 L2.1@253.095,65.113 ; L2.1@253.08,64.804 253.091,64.793 v1@253.091,64.615 ; C15.2@253.228,63.372 253.323,63.468 253.323,64.532 253.484,64.693 ; C15.2@253.241,63.371 253.241,65.073 L2.1@253.278,65.11 ; L2.1@253.356,64.935 253.356,64.819 253.633,64.542 253.633,63.291 253.48,63.139 C15.2@253.364,63.139 ; 253.363,64.12 253.4,64.157 L2.1@253.4,64.973 ; v1@253.444,64.281 253.512,64.213 253.512,63.215 ; U1.22@254.169,71.145 254.985,71.145 255.405,71.565 256.763,71.565 C7.2@256.94,71.388 ; 256.136,71.576 256.415,71.576 v1@257.069,72.231 ; 256.642,71.437 256.928,71.151 C7.2@256.928,71.096 ; 256.744,71.59 256.744,71.704 256.831,71.791 ; C7.2@256.918,71.154 C7.2@257.006,71.242 ; C7.2@256.92,71.331 256.92,72.09 v1@257.169,72.339 ; C7.2@256.996,71.274 257.001,71.274 257.097,71.37 257.097,72.08 v1@257.257,72.24
  Bottom Layer w0.2: v1@251.645,74.662 251.645,74.567 v1@251.664,74.547 ; v1@256.921,72.42 258.12,71.221 258.316,71.221 259.903,69.635 259.903,65.487 ; 257.915,71.448 258.092,71.271
  Bottom Layer w0.5: v1@248.596,74.158 251.151,74.158 251.62,74.628 256.076,74.628 256.797,73.907 256.797,72.735 258.154,71.378 258.154,71.371 260.032,69.493 260.032,64.969 259.414,64.352 v1@252.887,64.352 ; v1@248.601,74.164 v1@248.601,74.173
  other v1: 253.01,64.391 253.471,64.381 257.147,72.328 251.668,74.621
TP4056_VCC: R?.2@234.174,65.824 U?.4 U?.8
TPS_ON: U1.7 U2.5 | length 20.8
  Top Layer w0.2: v1@247.117,64.73 248.487,66.1 248.487,67.537 249.049,68.099 249.049,69.394 249.203,69.548 U1.7@250.215,69.548
  Top Layer w0.254: U2.5@246.959,57.863 246.959,58.32 247.12,58.481 248.18,58.481 ; v1(247.34,60.182) 248.225,60.182 248.747,59.659 248.747,58.762 248.439,58.453 248.03,58.453
  Bottom Layer w0.2: v1@247.19,60.109 v1@247.19,64.714
  Bottom Layer w0.254: v1@247.244,64.574 247.296,64.522 247.296,60.233 v1@247.339,60.19
  other v1: 247.182,64.676
USB: D1.1 P4.2 R5.2 R?.1@233.181,65.823 | length 11.1
  Top Layer w0.254: D1.1@237.152,55.233 237.152,51.779 P4.2@237.785,51.147 ; D1.1@237.225,55.265 237.323,55.168 237.323,52.695 P4.2@238.369,51.649 ; 237.323,52.46 237.323,51.682 P4.2@237.436,51.568 ; 237.331,52.46 237.785,52.006 P4.2@237.785,51.617 ; P4.2@237.436,51.576 237.436,51.982 237.606,52.152
USB_TEXT: R5.1 R7.2 U1.5 | length 28.7
  Top Layer w0.254: R5.1@238.225,53.854 238.23,53.854 238.325,53.76 R7.2@239.15,53.76 ; R5.1@238.253,54.009 238.336,54.092 R7.2@239.139,54.092 ; R5.1@238.271,53.911 239.139,53.911 R7.2@239.147,53.903 ; v1@246.086,65.213 246.184,65.311 v1@246.202,65.311 ; v1@246.202,65.329 247.504,66.631 247.504,67.789 248.131,68.417 248.131,70.018 248.464,70.351 U1.5@250.215,70.351
  Bottom Layer w0.254: v1(238.675,53.826) 238.952,54.102 245.053,54.102 246.086,55.136 v1@246.086,65.249
  other v1: 246.008,65.405
VCCBAT: C13.2 C14.2 C17.2 L1.1 R1.2 R2.2 U1.16 U2.6 | length 40.5
  Top Layer w0.254: L1.1@245.119,58.663 245.154,58.699 246.362,58.699 ; L1.1@245.179,58.809 245.174,58.809 245.235,58.87 245.995,58.87 C17.2@246.312,59.187 ; L1.1@245.345,58.699 245.345,58.694 245.436,58.603 246.252,58.603 246.443,58.412 ; 245.406,58.407 245.778,58.779 245.884,58.779 ; 246.111,58.814 246.201,58.905 C17.2@246.292,58.905 ; C17.2@246.368,59.076 C17.2@246.482,59.19 ; U2.6@246.478,57.868 246.478,58.97 C17.2@246.493,58.986 ; U1.16@253.596,68.601 253.596,68.327 254.412,67.51 C13.2@254.412,65.525 ; U1.16@253.643,68.453 254.527,67.57 254.527,65.048 ; R1.2@253.766,60.706 R1.2@253.872,60.601 ; R1.2@253.79,60.836 254.376,61.422 254.376,65.623 C13.2@254.421,65.667 ; 254.381,64.911 254.381,65.527 254.405,65.551 C13.2@254.421,65.551
  Top Layer w0.5: 246.154,58.936 246.335,58.936 246.341,58.942 246.341,60.53 247.165,61.354 253.959,61.354 254.42,61.815 254.42,67.518 254.266,67.671 ; 251.58,61.341 251.968,61.341 252.551,60.758 R2.2@252.551,60.577 ; R2.2@252.471,60.564 253.804,60.564 R1.2@253.824,60.584 ; 252.551,60.925 253.603,60.925 253.717,61.039 ; 253.601,60.647 253.601,60.747 254.405,61.551
VCCBATT: C18.1 C19.1 U3.3 U3.7 U3.11 | length 14.2
  Top Layer w0.254: C19.1@252.397,58.339 252.638,58.339 v1@252.98,57.998 ; C19.1@252.511,58.386 252.75,58.386 253.245,57.891 U3.3@253.884,57.891 ; v1@253.209,57.939 253.247,57.901 253.401,57.901 ; U3.11@254.881,58.891 254.881,59.439 255.112,59.67 255.866,59.67 v1@256.381,59.154 ; U3.7@255.354,57.303 255.354,57.197 255.406,57.145 256.85,57.145 C18.1@256.917,57.211 ; U3.7@255.415,57.352 255.456,57.394 256.411,57.394 C18.1@256.485,57.469 ; U3.7@255.425,57.34 256.794,57.34 C18.1@256.799,57.345
  Bottom Layer w0.254: v1@253.097,57.866 253.673,57.29 v1@256.115,57.29 ; v1@253.15,57.977 v1@253.15,58.149 ; v1@256.136,57.312 v1@256.136,58.974
  other v1: 256.071,57.336 253.109,57.911 256.286,59.08
pads on no net: B1.0 R?.1@231.583,63.856 R?.2@232.577,63.857 U1.12 U1.13 U2.1 U3.10 U?.0 U?.6 U?.7
copper on no net: | length 11.9
  Top Layer w0.2: 244.642,62.753 244.996,63.106 247.76,63.106 248.876,64.221 251.389,64.221 251.991,64.824 251.991,68.562

## Keep-outs
Keep-Out Layer:
  circle w0.254: c282.353,70.793 r9
  circle w0.254: c281.861,70.771 r14
  lines w0.08: 234.696,47.879 234.696,86.885 264.668,86.885 264.668,47.879 234.696,47.879

## Other copper
Top Layer:
  rectangle net NetB1_2: 239.43,59.043 240.567,60.708
  region net GND: 247.884,76.721 247.884,74.69 249.775,74.69 249.775,76.721
  region net GND: 254.245,58.541 254.245,57.709 255.387,57.709 255.387,58.541
  region net GND: 234.733,80.04 234.733,76.559 249.792,76.559 249.792,80.04
  region net GND: 251.162,77.1 251.162,75.973 252.245,75.973 252.245,77.1
  region net GND: 251.177,81.979 251.177,76.483 264.682,76.483 264.682,81.979
Bottom Layer:
  rectangle net GND: 234.701,72.443 248.04,76.459
  rectangle net GND: 234.731,75.205 264.726,80.033
  region net GND: 234.705,73.656 234.705,68.144 255.162,68.144 255.162,73.656

## Silkscreen, mask and mechanical layers (free items; w line width, h text height)
Top Overlay:
  lines w0.127: 259.732,111.957 268.229,111.957 ; 259.732,113.757 268.229,113.757
  text "RSTN" at 260.381,56.288 h1.2 r270
  text "GND" at 259.227,55.911 h1.2 r270
  text "SCK" at 256.562,55.641 h1.2 r270
  text "SCL" at 257.889,55.576 h1.2 r270
  text "NSS" at 261.687,55.587 h1.2 r270
  text "GND" at 259.237,50.236 h1.2 r270
  text "GND" at 240.053,50.174 h1.2 r270
  text "GND" at 246.845,50.174 h1.2 r270
  text "SDA" at 261.881,50.171 h1.2 r270
  text "BAT" at 260.478,50.084 h1.2 r270
  text "USB" at 237.416,50.041 h1.2 r270
  text "SO" at 257.964,50.031 h1.2 r270
  text "BAT" at 244.259,49.907 h1.2 r270
  text "SI" at 256.691,49.923 h1.2 r270
Bottom Overlay:
  lines w0.127: 239.088,116.969 242.342,123.376 244.571,122.244 241.317,115.837 239.088,116.969 ; 245.073,123.857 245.073,128.857 256.073,128.857 256.073,123.857 245.073,123.857
Top Solder:
  rectangle: 251.063,81.971 264.684,86.92
  region: 234.764,86.879 234.764,80.015 251.154,80.015 251.154,86.879
Bottom Solder:
  rectangle: 234.674,76.506 264.637,86.983
Mechanical 1:
  lines w0.127: 232.996,115.608 241.95,115.597 ; 253.589,123.358 cw(c253.589,120.758) 255.907,121.936 ; 253.603,123.307 247.501,123.307 ccw(c247.501,120.707) 245.183,121.884 241.929,115.477 ccw(c247.088,112.857) 241.929,110.237 245.183,103.83 ccw(c247.501,105.007) 247.501,102.407 253.603,102.407 ccw(c253.603,105.007) 255.921,103.83 259.175,110.237 ccw(c254.016,112.857) 259.175,115.477 255.921,121.884 ; 253.615,123.35 247.514,123.35 ccw(c247.514,120.75) 245.195,121.928 241.942,115.52 ccw(c247.101,112.9) 241.942,110.281 245.195,103.873 ccw(c247.514,105.05) 247.514,102.45 253.615,102.45 ccw(c253.615,105.05) 255.934,103.873 259.188,110.281 ccw(c254.029,112.9) 259.188,115.52 255.934,121.928 ; 259.152,115.589 268.107,115.6 ; 266.612,120.299 264.432,119.505 265.392,116.872 267.638,117.48 ; 287.605,114.412 296.559,114.401 ; 313.746,114.379 322.647,114.368 ; 233.2,116.349 ccw(c250.552,112.857) 264.102,101.468 262.344,102.89 262.9,103.586 264.671,102.182 ccw(c250.552,112.857) 258.641,128.601 257.654,126.567 256.852,126.954 257.818,128.997 ccw(c250.552,112.857) 233.403,117.239 235.606,116.73 235.407,115.862 233.2,116.349 ; 233.213,116.393 ccw(c250.565,112.9) 264.114,101.511 262.357,102.933 262.912,103.629 264.683,102.225 ccw(c250.565,112.9) 258.653,128.644 257.667,126.61 256.864,126.997 257.831,129.04 ccw(c250.565,112.9) 233.416,117.283 235.618,116.773 235.42,115.905 233.213,116.393 ; 291.029,101.037 cw(c305.147,111.712) 297.059,127.456 298.045,125.422 298.848,125.809 297.881,127.852 cw(c305.147,111.712) 322.296,116.094 320.094,115.585 320.292,114.717 322.499,115.204 cw(c305.147,111.712) 291.598,100.323 293.355,101.745 292.8,102.441 291.029,101.037 ; 296.524,109.092 cw(c301.683,111.712) 296.524,114.332 299.778,120.739 cw(c302.096,119.562) 302.096,122.162 308.198,122.162 cw(c308.198,119.562) 310.516,120.739 313.77,114.332 cw(c308.611,111.712) 313.77,109.092 310.516,102.685 cw(c308.198,103.862) 308.198,101.262 302.096,101.262 cw(c302.096,103.862) 299.778,102.685 296.524,109.092 ; 299.639,122.669 310.639,122.669 310.639,127.669 299.639,127.669 299.639,122.669 ; 311.141,121.056 313.37,122.188 316.623,115.781 314.394,114.649 311.141,121.056
Mechanical 2:
  circle w0.064: c235.418,103.742 r0.032
  circle w0.064: c268.229,113.757 r0.032
  circle w0.064: c268.229,111.957 r0.032
  circle w0.064: c320.294,102.553 r0.032
Mechanical 3:
  text "BOTTOM" at 298.39,90.853 h2.54

## Text inside footprints (layer, text, board x,y; h text height)
D1: Top Overlay "+" at 237.005,55.635 h1
D2: Top Overlay "+" at 239.654,57.022 h1 r180
U3: Top Overlay "x" at 254.159,58.194 h0.8; Top Overlay "Y" at 254.632,57.606 h0.8